# EAGLE board CRDC (EAGLE 9.1.3)
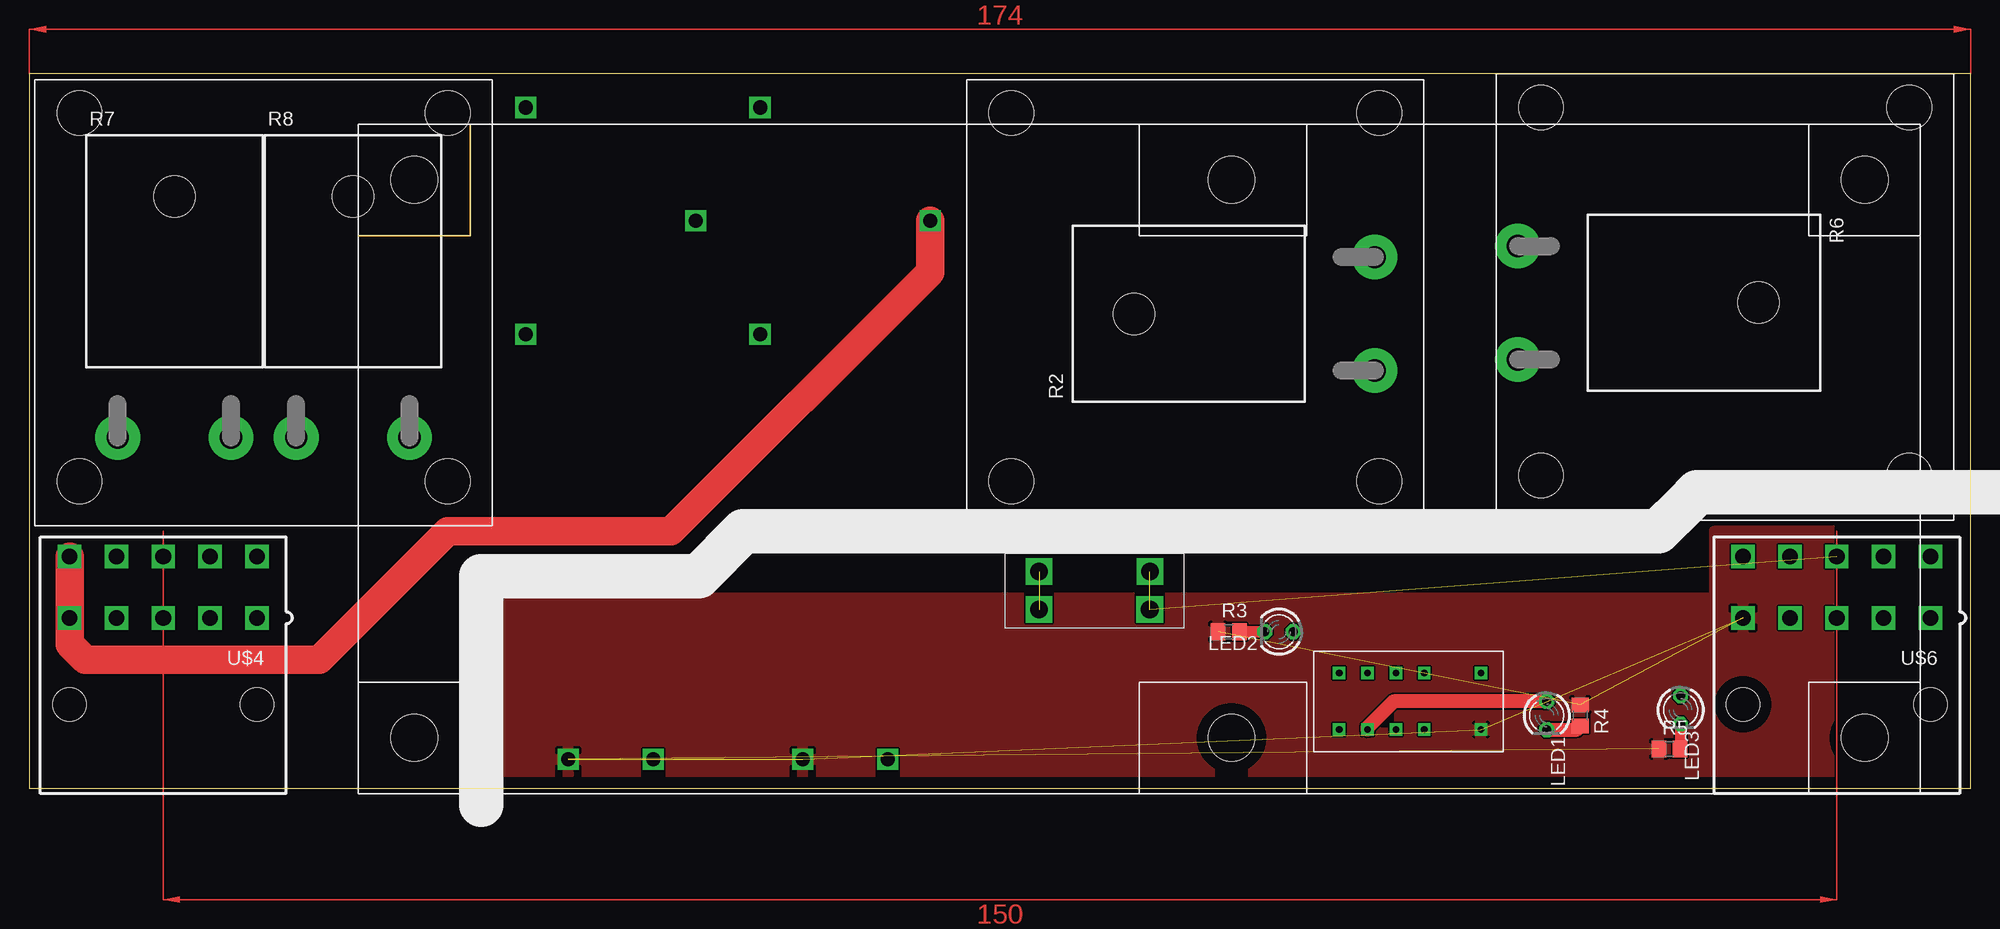
[diagram p0: board, top side]
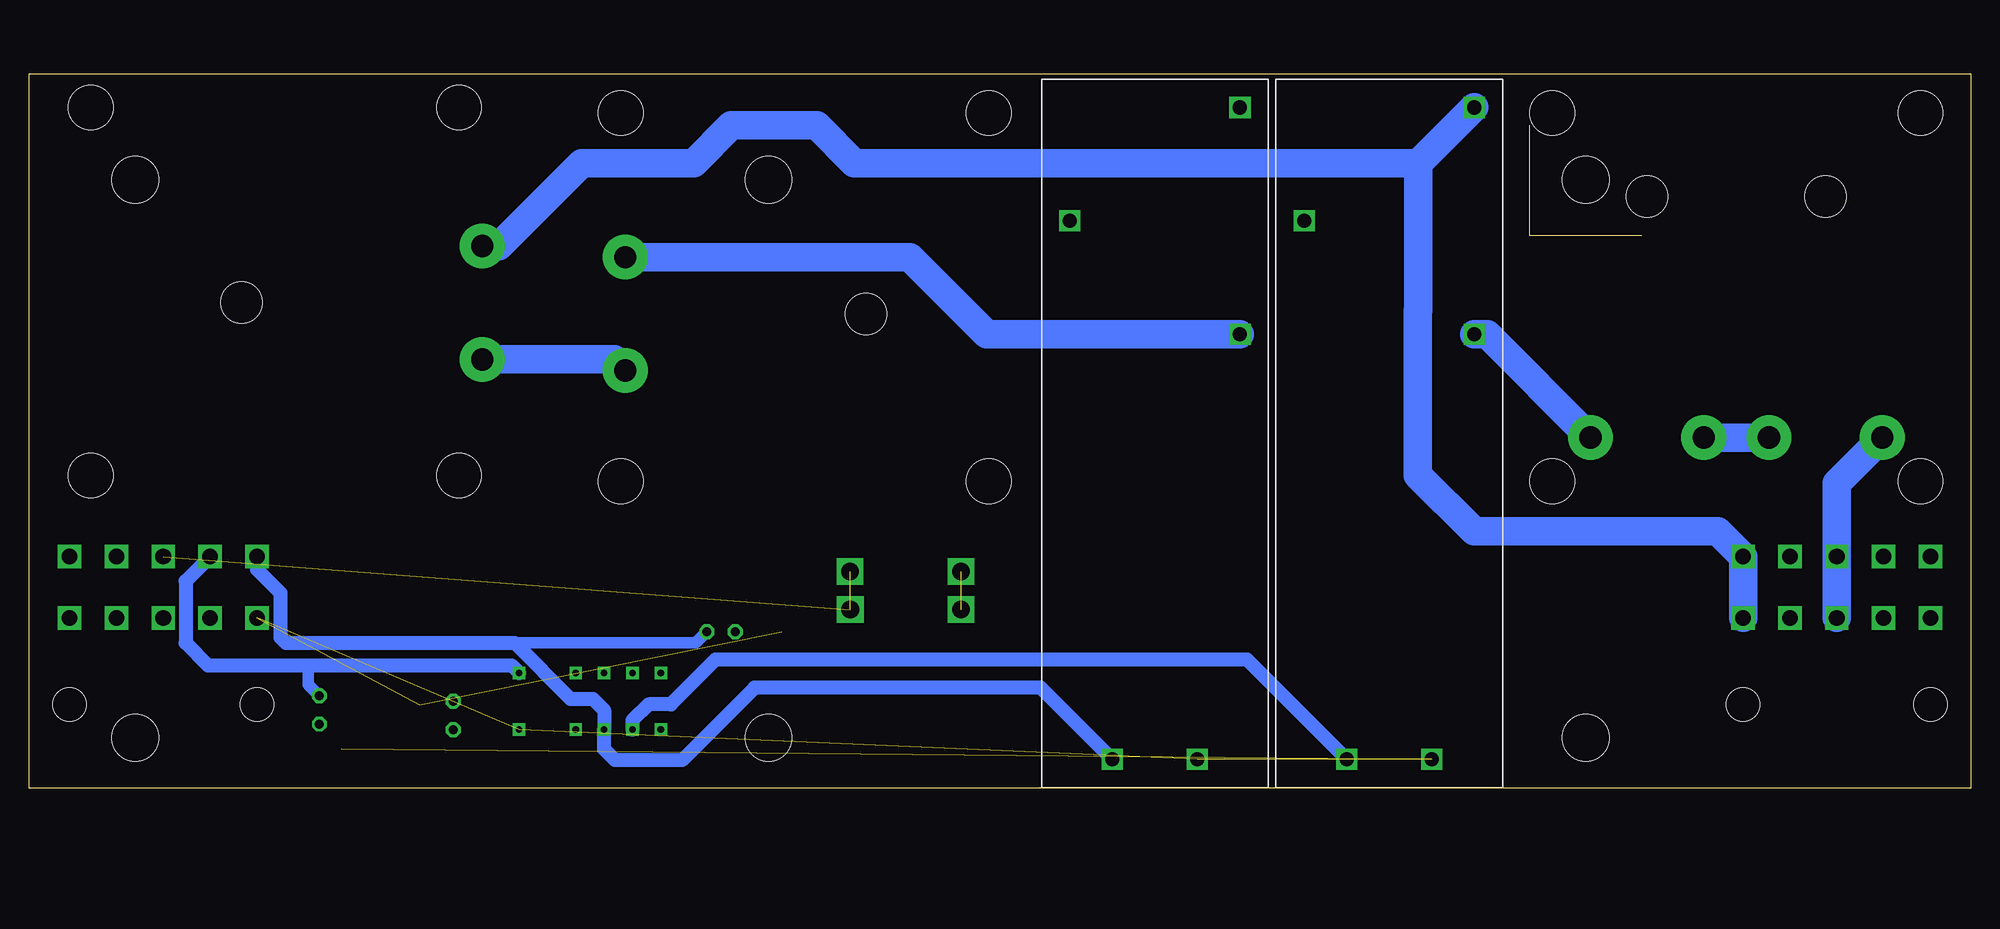
[diagram p1: board, bottom side, seen from below]

Size 174 x 64 mm. Coordinates in mm from the lower left corner, seen from the top.
Outline: 0,0 174,0 174,64 0,64 0,0
Copper layers (1*16): Top 0.035mm / dielectric 1.5mm / Bottom 0.035mm
Design rules "default": minimum track width 6mil, minimum drill 0.35mm, track to track 6mil, track to pad 6mil, pad to pad 6mil, via to via 6mil, smd to smd 6mil, copper to edge 40mil, drill to drill 6mil, minimum pad ring 10mil, minimum via ring 8mil, stop-mask expansion 4mil, vias tented up to drill 0mil, thermal gap 10mil
Net classes: 0 default: width 1 mm, clearance 0.152 mm; 1 LV: clearance 0.001 mm; 2 HV: clearance 2.5 mm

## Footprints (pad centres in the part's own frame; a part is rotated, then mirrored left to right if it is on the bottom)
LED3MM = drill 0.813 octagon: A -1.27,0; K 1.27,0
TO-247-2H = drill 2 pad 4: 1 -5.08,-21.59; 2 5.08,-21.59 | hole 3.7: 0,0
R0805 = smd 1.3 x 1.5: 1 -0.95,0; 2 0.95,0
G81C335 = drill 1.27 square: COM 20.32,0; L1 58.42,-11.43; L2 58.42,-3.81; NC 10.16,-15.24; NO 0,0
15-24-6100 = drill 1.4 square: 1 8.4,-2.75; 2 4.2,-2.75; 3 0,-2.75; 4 -4.2,-2.75; 5 -8.4,-2.75; 6 8.4,2.75; 7 4.2,2.75; 8 0,2.75; 9 -4.2,2.75; 10 -8.4,2.75 | hole 3: 8.4,-10.5; -8.4,-10.5
HEATSINK40X40X15 = hole 4: 0,0; 33,0; 33,33; 0,33
V23079B1203B301 = drill 0.6 square: 1 0,-5.08; 3 5.08,-5.08; 4 7.62,-5.08; 5 10.16,-5.08; 6 12.7,-5.08; 7 12.7,0; 8 10.16,0; 9 7.62,0; 10 5.08,0; 12 0,0
BENDER_IRR155 = hole 4.2: 5,5; 5,55; 78.25,55; 78.25,5; 135,55; 135,5
3568 = drill 1.6 square: L1 0,3.4; L2 0,0; R1 9.94,3.4; R2 9.92,0

## Placement (x,y rotation side)
LED1  [LED3MM]  136,6.5 270 top
LED2  [LED3MM]  112,14 180 top
LED3  [LED3MM]  148,7 270 top
R2  [TO-247-2H]  99,42.5 90 top
R3  [R0805]  107.5,14 0 top
R4  [R0805]  139,6.5 270 top
R5  [R0805]  147,3.5 0 top
R6  [TO-247-2H]  155,43.5 270 top
R7  [TO-247-2H]  13,53 0 top
R8  [TO-247-2H]  29,53 0 top
U$1  G81C335  [G81C335]  44.5,61 270 bottom
U$2  G81C335  [G81C335]  65.5,61 270 bottom
U$4  15-24-6100  [15-24-6100]  12,18 0 top
U$5  HEATSINK40X40X15  [HEATSINK40X40X15]  135.5,28 0 top
U$6  15-24-6100  [15-24-6100]  162,18 0 top
U$7  V23079B1203B301  [V23079B1203B301]  130.1,5.24 180 top
U$8  HEATSINK40X40X15  [HEATSINK40X40X15]  88,27.5 0 top
U$9  HEATSINK40X40X15  [HEATSINK40X40X15]  4.5,27.5 0 top
U$10  BENDER_IRR155  [BENDER_IRR155]  29.5,-0.5 0 top
U$11  3568FUSEHOLDER  [3568]  90.5,16 0 top

## Library data of the parts
LED1-LED3 U$1 U$2 U$4-U$11 = ACC-MB-R0
R2 R6-R8 = ACC-MB-R0; OC_FARNELL: unknown; OC_NEWARK: unknown
R3-R5 = ACC-MB-R0; SPICEPREFIX: R

## Nets
+12V_IMD: U$11.L1 U$11.L2
+12V_SAFE: LED2.A U$2.L1 U$6.10 U$7.9
GND: R3.1 R4.1 R5.1 U$1.L2 U$2.L2 U$6.5 U$7.12
HV+_DRY [HV]: R6.1 U$1.NO U$4.1 U$4.6
HV+_WET [HV]: R7.1 U$4.3 U$4.8
HV-_DRY_AUX [HV]: U$2.NC U$4.5 U$4.10
N$1: LED2.K R3.2
N$2: LED3.K R5.2
N$3: U$6.8 U$11.R1 U$11.R2
N$4: R2.2 U$2.COM
N$5: LED1.K R4.2
N$6: R2.1 R6.2
N$8: R7.2 R8.1
N$21: R8.2 U$1.COM
PRECHARGE: LED1.A U$1.L1 U$7.8
PRECHARGE_EN: LED3.A U$6.9 U$7.1

## Tracks (layer width: path | path; a pad name or v marks a point on that pad's centre or on a via)
+12V_IMD  (1 unrouted)
+12V_SAFE
  Bottom 1.016: LED2.A 114.27,13 130.5,13
  Bottom 1.27: U$6.10 153.6,19.6 151.5,17.5 151.5,13.5 151,13 130.5,13 125.5,8 123.5,8 122.48,6.98 U$7.9 122.48,3.52 122.5,3.5 121.5,2.5 115.5,2.5 109,9 83.35,9 U$2.L1
GND  (6 unrouted)
  pour Top: 43,17 43,-3 177,-3 177,23 151,23 151,17
HV+_DRY
  Bottom 2.54: U$4.1 U$4.6 | U$4.6 20.9,21.25 | 49.5,56 100.05,56 103.43,59.39 111.07,59.39 114.45,56 124.5,56 131.92,48.58 R6.1 | 49.5,56 U$1.NO | U$4.6 22.65,23 44.5,23 49.54,28.04 49.54,42.77 49.5,42.81 49.5,56
HV+_WET
  Bottom 2.54: U$4.3 U$4.8 12,27.33 R7.1
HV-_DRY_AUX
  Top 2.54: U$4.5 U$4.10 3.6,12.9 5,11.5 26,11.5 32.25,17.75 37.5,23 57.5,23 80.74,46.24 U$2.NC
N$1
  Top 1.016: R3.2 LED2.K
N$2
  Top 1.016: R5.2 148,3.55 LED3.K
N$3  (2 unrouted)
N$4
  Bottom 2.54: R2.2 95.08,47.58 88.18,40.68 U$2.COM
N$5
  Top 1.27: LED1.K 138.68,5.23 R4.2
N$6
  Bottom 2.54: R6.2 121.59,38.42 R2.1
N$8
  Bottom 2.54: R7.2 R8.1
N$21
  Bottom 2.54: R8.2 43.35,40.68 U$1.COM
PRECHARGE
  Top 1.27: LED1.A 122.27,7.77 119.94,5.44 U$7.8
  Bottom 1.27: U$1.L1 64.85,11.5 112.5,11.5 116.5,7.5 118.5,7.5 119.94,6.06 U$7.8
PRECHARGE_EN
  Bottom 1.016: LED3.A 149,9.27 149,11
  Bottom 1.27: U$6.9 160,18.55 160,13 158,11 149,11 130.78,11 U$7.1
(copper drawn outside any net)
  shapes: Top area x3